# Altium PCB PCB.PcbDoc (part 2 of 2)
Units mm, origin at the board's own origin, x right, y up, seen from the top; angles counter-clockwise.
Board outline 100 x 25 mm, 4 copper layers (Top Layer, Layer 2, Layer 3, Bottom Layer), stack 1.513 mm thick; 98 components, 75 nets, 360 pads, 1081 vias.
Unrouted connection lines stored in the file: 86.
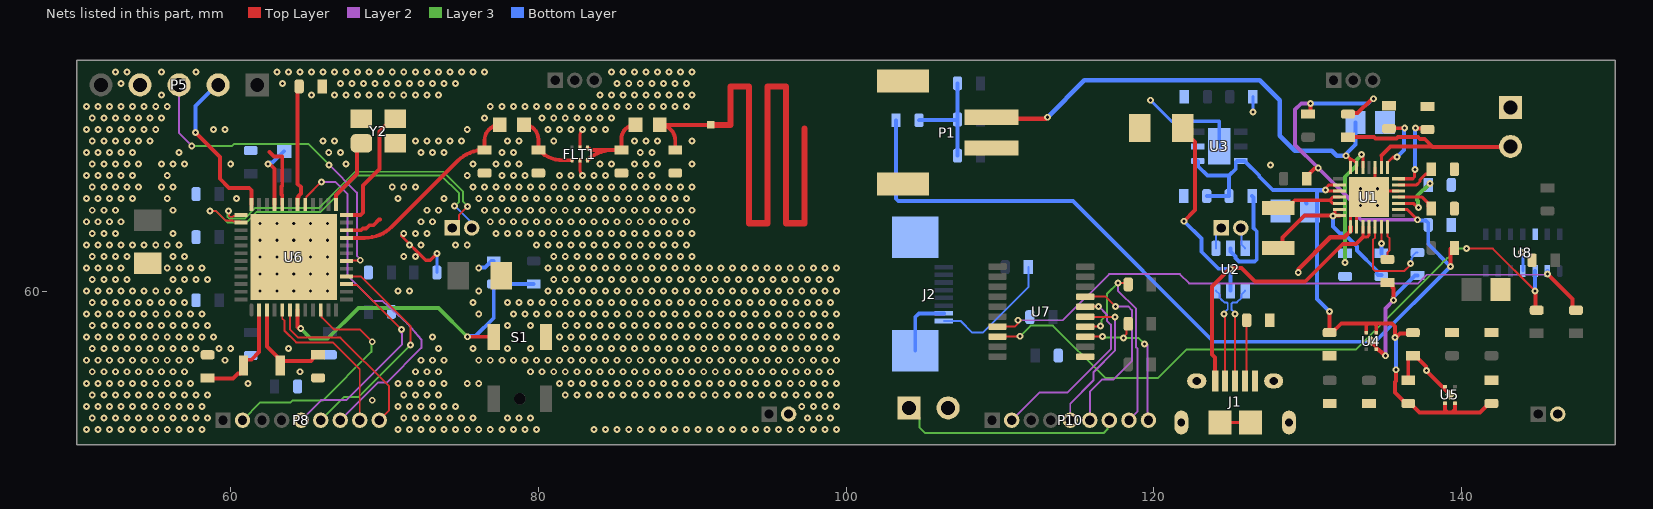
[diagram p4: the nets of this part, all layers, seen from the top]

## Via types
v1: diameter 0.45, hole 0.2, Top Layer to Bottom Layer, tented both sides, 1052 vias
v2: diameter 0.5, hole 0.2, Top Layer to Bottom Layer, 29 vias

## Nets (pads, with @x,y where several pads share a name; then routed paths per layer and width w, separated by ;. In a path a pad name is that pad's centre, name@x,y a point inside that pad or via, vN(x,y) a via of type N, cw(c..) or ccw(c..) an arc to the next point about the centre after c; other vN are vias at no path point) (continued)
GND: C1.1 C3.1 C4.1 C5.2 C6.2 C7.2 C8.2 C9.2 C10.1 C11.2 C12.2 C13.2 C14.2 C15.2 C16.2 C17.2 C18.2 C19.1 C20.1 C21.1 C22.1 C23.1 C24.1 C25.1 C26.1 C27.1 C28.1 C29.1 C30.1 C31.1 C32.1 C33.1 C34.2 C35.1 C36.1 C37.1 C38.1 C39.1 C40.1 D4.2 FLT1.2 FLT1.5 J1.5 J1.6 J1.7 J1.8 J1.9 J1.10 J1.11 J2.2 J2.MP1 J2.MP2 P1.2 P1.MP1 P1.MP2 P2.2 P5.4 P9.2 R5.1 R6.1 R7.1 R8.2 R9.2 R10.2 R12.2 R13.2 R15.1 RT1.1 S1.2 S3.2 U1.1 U1.2 U1.12 U1.17 U1.29 U2.2 U3.2 U3.7 U4.2 U4.5 U5.2 U5.5 U6.22 U6.32 U6.49 U7.11 U8.4 U8.12 Y2.2 Y2.4 | length 61.5
  Top Layer w0.2: v1@71.1,63.6 71.1,63.576 72.676,62 72.978,62 v1(73.404,62.426) ; FLT1.2@82.7,68.5 82.7,67.923 ccw(c83.298,67.923) v1(82.875,67.5) ; FLT1.5@82.7,69.3 82.7,70.077 cw(c83.298,70.077) v1(82.875,70.5) ; J1.10@124.3,51.45 J1.11@126.3,51.45 ; U1.1@132.8,64.175 U1.29@132.8,64.9 ; U1.2@133.2,64.175 U1.29@133.2,65.3 ; U1.29@134.4,66.8 U1.17@134.4,68.025 ; U1.29@134.7,66.5 U1.12@135.925,66.5
  Top Layer w0.254: 62.53,69.028 62.809,68.75 63.35,68.75 63.35,66.84 63.298,66.788 63.298,66.286 63.35,66.234 U6.32@63.35,65.625 ; U6.22@67.525,63.95 68.479,63.95 68.598,64.069 68.808,64.069 69.015,64.277 69.281,64.277 69.64,64.636 69.693,64.636 ; U1.29@132.827,64.927 133.2,65.3 v2(133.45,65.55) U1.29@134,66.1 ; U4.5@134.146,56.746 134.146,56.696 134.471,56.371 ; U1.29@134.4,66.8 v2(134.55,66.65) U1.29@134.7,66.5 ; U4.2@134.5,56.3 134.62,56.18 135.069,55.79 v1(135.07,55.791) ; R12.2@135.2,60.55 135.35,60.55 135.523,60.377 135.523,60.227 135.6,60.15 v1(135.6,59.4) ; C16.2@136.554,54.191 136.554,55.623 136.727,55.796 C11.2@136.85,55.796 137,55.796 137.708,55.088 137.708,54.88 v1(137.745,54.842) ; v1@137.745,54.83 137.745,54.792 139.259,53.279 U5.5@139.259,53.241
  Top Layer w0.3: v1(129.4,61.215) 129.429,61.244 129.429,61.429 131.488,63.488 132.388,63.488 132.8,63.9 U1.1@132.8,64.175
  Layer 2 w0.254: v1(135.07,55.791) 135.07,58.87 v1(135.6,59.4)
  Bottom Layer w0.2: C31.1@73.404,61.2 v1(73.404,62.426) ; v1(119.8,72.4) 121.165,71.035 124.265,71.035 U3.7@124.265,69.4 ; v1(126.45,71.65) C8.2@126.45,72.629 ; v1(143.9,62.5) 143.9,62.432 144,62.332 U8.4@144,61.3
  Bottom Layer w0.254: v1(76.125,61.5) 76.163,61.538 76.538,61.538 76.95,61.95 C34.2@77.1,61.95 ; J2.MP1@104.5,56.12 104.5,58.3 104.75,58.55 J2.2@106.36,58.55 ; U2.2@125,62.775 125,62.575 125.323,62.252 125.323,62.14 125.557,61.905 126.556,61.905 126.705,62.054 126.705,63.887 126.497,64.095 126.497,66.078 C5.2@126.404,66.171 ; v1(135.6,59.4) 135.6,59.6 137,61 R9.2@137.15,61
  other v1: 50.625,51 51.375,51 52.125,51 52.875,51 53.625,51 54.375,51 55.125,51 55.875,51 56.625,51 57.375,51 58.125,51 70.875,51 71.625,51 72.375,51 73.125,51 73.875,51 74.625,51 75.375,51 76.125,51 76.875,51 77.625,51 78.375,51 79.125,51 79.875,51 83.625,51 84.375,51 85.125,51 85.875,51 86.625,51 87.375,51 88.125,51 88.875,51 89.625,51 90.375,51 91.125,51 91.875,51 92.625,51 93.375,51 94.125,51 94.875,51 95.625,51 96.375,51 97.125,51 97.875,51 98.625,51 99.375,51 51,51.75 51.75,51.75 52.5,51.75 53.25,51.75 54,51.75 54.75,51.75 55.5,51.75 56.25,51.75 57,51.75 57.75,51.75 58.5,51.75 71.25,51.75 72,51.75 72.75,51.75 73.5,51.75 74.25,51.75 75,51.75 75.75,51.75 78,51.75 78.75,51.75 79.5,51.75 97.5,51.75 98.25,51.75 99,51.75 50.625,52.5 51.375,52.5 52.125,52.5 52.875,52.5 53.625,52.5 54.375,52.5 55.125,52.5 55.875,52.5 56.625,52.5 57.375,52.5 58.125,52.5 70.875,52.5 71.625,52.5 72.375,52.5 73.125,52.5 73.875,52.5 74.625,52.5 97.125,52.5 97.875,52.5 98.625,52.5 99.375,52.5 69.2,52.9 51,53.25 51.75,53.25 52.5,53.25 53.25,53.25 54,53.25 54.75,53.25 55.5,53.25 56.25,53.25 57,53.25 57.75,53.25 58.5,53.25 71.25,53.25 72,53.25 72.75,53.25 73.5,53.25 81.75,53.25 82.5,53.25 83.25,53.25 84,53.25 84.75,53.25 85.5,53.25 86.25,53.25 87,53.25 87.75,53.25 88.5,53.25 89.25,53.25 90,53.25 90.75,53.25 91.5,53.25 92.25,53.25 93,53.25 93.75,53.25 94.5,53.25 95.25,53.25 96,53.25 96.75,53.25 97.5,53.25 98.25,53.25 99,53.25 50.625,54 51.375,54 52.125,54 52.875,54 53.625,54 54.375,54 55.125,54 55.875,54 56.625,54 57.375,54 61.125,54 70.875,54 71.625,54 72.375,54 73.125,54 73.875,54 75.375,54 76.125,54 81.375,54 82.125,54 82.875,54 83.625,54 84.375,54 85.125,54 85.875,54 86.625,54 87.375,54 88.125,54 88.875,54 89.625,54 90.375,54 91.125,54 91.875,54 92.625,54 93.375,54 94.125,54 94.875,54 95.625,54 96.375,54 97.125,54 97.875,54 98.625,54 99.375,54 51,54.75 51.75,54.75 52.5,54.75 53.25,54.75 54,54.75 54.75,54.75 55.5,54.75 56.25,54.75 57,54.75 64.5,54.75 72,54.75 72.75,54.75 73.5,54.75 79.5,54.75 80.25,54.75 81,54.75 81.75,54.75 82.5,54.75 83.25,54.75 84,54.75 84.75,54.75 85.5,54.75 86.25,54.75 87,54.75 87.75,54.75 88.5,54.75 89.25,54.75 90,54.75 90.75,54.75 91.5,54.75 92.25,54.75 93,54.75 93.75,54.75 94.5,54.75 95.25,54.75 96,54.75 96.75,54.75 97.5,54.75 98.25,54.75 99,54.75 50.625,55.5 51.375,55.5 52.125,55.5 52.875,55.5 53.625,55.5 54.375,55.5 55.125,55.5 55.875,55.5 56.625,55.5 57.375,55.5 59.625,55.5 72.375,55.5 73.125,55.5 73.875,55.5 76.125,55.5 76.875,55.5 77.625,55.5 78.375,55.5 79.125,55.5 79.875,55.5 80.625,55.5 81.375,55.5 82.125,55.5 82.875,55.5 83.625,55.5 84.375,55.5 85.125,55.5 85.875,55.5 86.625,55.5 87.375,55.5 88.125,55.5 88.875,55.5 89.625,55.5 90.375,55.5 91.125,55.5 91.875,55.5 92.625,55.5 93.375,55.5 94.125,55.5 94.875,55.5 95.625,55.5 96.375,55.5 97.125,55.5 97.875,55.5 98.625,55.5 99.375,55.5 51,56.25 51.75,56.25 52.5,56.25 53.25,56.25 54,56.25 54.75,56.25 55.5,56.25 56.25,56.25 57,56.25 57.75,56.25 59.25,56.25 60,56.25 63.75,56.25 73.5,56.25 75.75,56.25 78,56.25 79.5,56.25 81.75,56.25 82.5,56.25 83.25,56.25 84,56.25 84.75,56.25 85.5,56.25 86.25,56.25 87,56.25 87.75,56.25 88.5,56.25 89.25,56.25 90,56.25 90.75,56.25 91.5,56.25 92.25,56.25 93,56.25 93.75,56.25 94.5,56.25 95.25,56.25 96,56.25 96.75,56.25 97.5,56.25 98.25,56.25 99,56.25 50.625,57 51.375,57 52.125,57 52.875,57 53.625,57 54.375,57 55.125,57 55.875,57 56.625,57 57.375,57 58.125,57 58.875,57 73.125,57 81.375,57 82.125,57 82.875,57 83.625,57 84.375,57 85.125,57 85.875,57 86.625,57 87.375,57 88.125,57 88.875,57 89.625,57 90.375,57 91.125,57 91.875,57 92.625,57 93.375,57 94.125,57 94.875,57 95.625,57 96.375,57 97.125,57 97.875,57 98.625,57 99.375,57 51,57.75 51.75,57.75 52.5,57.75 53.25,57.75 54,57.75 54.75,57.75 55.5,57.75 56.25,57.75 57,57.75 57.75,57.75 58.5,57.75 78,57.75 79.5,57.75 81.75,57.75 82.5,57.75 83.25,57.75 84,57.75 84.75,57.75 85.5,57.75 86.25,57.75 87,57.75 87.75,57.75 88.5,57.75 89.25,57.75 90,57.75 90.75,57.75 91.5,57.75 92.25,57.75 93,57.75 93.75,57.75 94.5,57.75 95.25,57.75 96,57.75 96.75,57.75 97.5,57.75 98.25,57.75 99,57.75 50.625,58.5 51.375,58.5 52.125,58.5 52.875,58.5 53.625,58.5 54.375,58.5 55.125,58.5 55.875,58.5 56.625,58.5 57.375,58.5 58.125,58.5 76.125,58.5 78.375,58.5 79.125,58.5 79.875,58.5 80.625,58.5 81.375,58.5 82.125,58.5 82.875,58.5 83.625,58.5 84.375,58.5 85.125,58.5 85.875,58.5 86.625,58.5 87.375,58.5 88.125,58.5 88.875,58.5 89.625,58.5 90.375,58.5 91.125,58.5 91.875,58.5 92.625,58.5 93.375,58.5 94.125,58.5 94.875,58.5 95.625,58.5 96.375,58.5 97.125,58.5 97.875,58.5 98.625,58.5 99.375,58.5 51,59.25 51.75,59.25 52.5,59.25 53.25,59.25 54,59.25 54.75,59.25 55.5,59.25 56.25,59.25 57,59.25 75.75,59.25 78,59.25 78.75,59.25 79.5,59.25 80.25,59.25 81,59.25 81.75,59.25 82.5,59.25 83.25,59.25 84,59.25 84.75,59.25 85.5,59.25 86.25,59.25 87,59.25 87.75,59.25 88.5,59.25 89.25,59.25 90,59.25 90.75,59.25 91.5,59.25 92.25,59.25 93,59.25 93.75,59.25 94.5,59.25 95.25,59.25 96,59.25 96.75,59.25 97.5,59.25 98.25,59.25 99,59.25 50.625,60 51.375,60 52.125,60 52.875,60 53.625,60 54.375,60 55.125,60 55.875,60 56.625,60 70.875,60 71.625,60 76.125,60 80.625,60 81.375,60 82.125,60 82.875,60 83.625,60 84.375,60 85.125,60 85.875,60 86.625,60 87.375,60 88.125,60 88.875,60 89.625,60 90.375,60 91.125,60 91.875,60 92.625,60 93.375,60 94.125,60 94.875,60 95.625,60 96.375,60 97.125,60 97.875,60 98.625,60 99.375,60 51,60.75 51.75,60.75 52.5,60.75 53.25,60.75 56.25,60.75 57,60.75 57.75,60.75 58.5,60.75 81,60.75 81.75,60.75 82.5,60.75 83.25,60.75 84,60.75 84.75,60.75 85.5,60.75 86.25,60.75 87,60.75 87.75,60.75 88.5,60.75 89.25,60.75 90,60.75 90.75,60.75 91.5,60.75 92.25,60.75 93,60.75 93.75,60.75 94.5,60.75 95.25,60.75 96,60.75 96.75,60.75 97.5,60.75 98.25,60.75 99,60.75 50.625,61.5 51.375,61.5 52.125,61.5 52.875,61.5 55.875,61.5 56.625,61.5 57.375,61.5 58.125,61.5 80.625,61.5 81.375,61.5 82.125,61.5 82.875,61.5 83.625,61.5 84.375,61.5 85.125,61.5 85.875,61.5 86.625,61.5 87.375,61.5 88.125,61.5 88.875,61.5 89.625,61.5 90.375,61.5 91.125,61.5 91.875,61.5 92.625,61.5 93.375,61.5 94.125,61.5 94.875,61.5 95.625,61.5 96.375,61.5 97.125,61.5 97.875,61.5 98.625,61.5 99.375,61.5 51,62.25 51.75,62.25 52.5,62.25 53.25,62.25 56.25,62.25 57,62.25 71.25,62.25 72,62.25 81,62.25 81.75,62.25 82.5,62.25 83.25,62.25 84,62.25 84.75,62.25 85.5,62.25 86.25,62.25 87,62.25 87.75,62.25 88.5,62.25 89.25,62.25 90,62.25 50.625,63 51.375,63 52.125,63 52.875,63 53.625,63 54.375,63 55.125,63 55.875,63 56.625,63 71.625,63 72.375,63 74.625,63 75.375,63 79.875,63 80.625,63 81.375,63 82.125,63 82.875,63 83.625,63 84.375,63 85.125,63 85.875,63 86.625,63 87.375,63 88.125,63 88.875,63 89.625,63 51,63.75 51.75,63.75 52.5,63.75 56.25,63.75 71.25,63.75 72,63.75 72.75,63.75 77.25,63.75 78,63.75 78.75,63.75 79.5,63.75 80.25,63.75 81,63.75 81.75,63.75 82.5,63.75 83.25,63.75 84,63.75 84.75,63.75 85.5,63.75 86.25,63.75 87,63.75 87.75,63.75 88.5,63.75 89.25,63.75 90,63.75 50.625,64.5 51.375,64.5 52.125,64.5 52.875,64.5 72.375,64.5 73.125,64.5 76.875,64.5 77.625,64.5 78.375,64.5 79.125,64.5 79.875,64.5 80.625,64.5 81.375,64.5 82.125,64.5 82.875,64.5 83.625,64.5 84.375,64.5 85.125,64.5 85.875,64.5 86.625,64.5 87.375,64.5 88.125,64.5 88.875,64.5 89.625,64.5 51,65.25 51.75,65.25 52.5,65.25 56.25,65.25 72.75,65.25 73.5,65.25 76.5,65.25 77.25,65.25 78,65.25 78.75,65.25 79.5,65.25 80.25,65.25 81,65.25 81.75,65.25 82.5,65.25 83.25,65.25 84,65.25 84.75,65.25 85.5,65.25 86.25,65.25 87,65.25 87.75,65.25 88.5,65.25 89.25,65.25 90,65.25 50.625,66 51.375,66 52.125,66 52.875,66 53.625,66 55.875,66 60.375,66 70.875,66 73.875,66 76.125,66 76.875,66 77.625,66 78.375,66 79.125,66 79.875,66 80.625,66 81.375,66 82.125,66 82.875,66 83.625,66 84.375,66 85.125,66 85.875,66 86.625,66 87.375,66 88.125,66 88.875,66 89.625,66 51,66.75 51.75,66.75 52.5,66.75 53.25,66.75 54,66.75 55.5,66.75 56.25,66.75 70.5,66.75 71.25,66.75 72,66.75 75.75,66.75 76.5,66.75 77.25,66.75 78,66.75 78.75,66.75 79.5,66.75 80.25,66.75 81,66.75 81.75,66.75 82.5,66.75 83.25,66.75 84,66.75 84.75,66.75 85.5,66.75 86.25,66.75 87,66.75 87.75,66.75 88.5,66.75 89.25,66.75 90,66.75 50.625,67.5 51.375,67.5 52.125,67.5 52.875,67.5 53.625,67.5 55.875,67.5 75.375,67.5 77.625,67.5 78.375,67.5 79.125,67.5 81.375,67.5 82.125,67.5 83.625,67.5 84.375,67.5 86.625,67.5 87.375,67.5 127.6,68.193 51,68.25 51.75,68.25 52.5,68.25 53.25,68.25 54,68.25 55.5,68.25 56.25,68.25 57,68.25 60,68.25 67.5,68.25 75.75,68.25 77.25,68.25 78,68.25 78.75,68.25 84,68.25 84.75,68.25 86.25,68.25 87,68.25 87.75,68.25 90,68.25 50.625,69 51.375,69 52.125,69 52.875,69 53.625,69 56.625,69 66.375,69 67.125,69 72.375,69 73.125,69 73.875,69 77.625,69 78.375,69 86.625,69 87.375,69 51,69.75 51.75,69.75 52.5,69.75 53.25,69.75 54,69.75 54.75,69.75 66,69.75 66.75,69.75 72,69.75 72.75,69.75 73.5,69.75 74.25,69.75 75,69.75 78,69.75 78.75,69.75 81,69.75 86.25,69.75 87,69.75 87.75,69.75 90,69.75 50.625,70.5 51.375,70.5 52.125,70.5 52.875,70.5 53.625,70.5 54.375,70.5 55.125,70.5 58.875,70.5 59.625,70.5 75.375,70.5 80.625,70.5 81.375,70.5 82.125,70.5 83.625,70.5 84.375,70.5 51,71.25 51.75,71.25 52.5,71.25 53.25,71.25 54,71.25 54.75,71.25 55.5,71.25 76.5,71.25 80.25,71.25 81,71.25 81.75,71.25 82.5,71.25 83.25,71.25 84,71.25 84.75,71.25 50.625,72 51.375,72 52.125,72 52.875,72 53.625,72 54.375,72 55.125,72 55.875,72 76.875,72 77.625,72 78.375,72 79.125,72 79.875,72 80.625,72 81.375,72 82.125,72 82.875,72 83.625,72 84.375,72 85.125,72 85.875,72 86.625,72 87.375,72 88.125,72 88.875,72 89.625,72 55.5,72.75 65.25,72.75 66.75,72.75 67.5,72.75 68.25,72.75 69,72.75 69.75,72.75 70.5,72.75 71.25,72.75 72,72.75 72.75,72.75 73.5,72.75 84,72.75 84.75,72.75 85.5,72.75 86.25,72.75 87,72.75 87.75,72.75 88.5,72.75 89.25,72.75 90,72.75 52.875,73.5 63.375,73.5 67.125,73.5 67.875,73.5 68.625,73.5 69.375,73.5 70.125,73.5 70.875,73.5 71.625,73.5 72.375,73.5 73.125,73.5 73.875,73.5 74.625,73.5 85.125,73.5 85.875,73.5 86.625,73.5 87.375,73.5 88.125,73.5 88.875,73.5 89.625,73.5 52.5,74.25 53.25,74.25 55.5,74.25 57.75,74.25 63,74.25 63.75,74.25 64.5,74.25 65.25,74.25 66,74.25 66.75,74.25 67.5,74.25 68.25,74.25 69,74.25 69.75,74.25 70.5,74.25 71.25,74.25 72,74.25 72.75,74.25 73.5,74.25 74.25,74.25 75,74.25 75.75,74.25 76.5,74.25 84.75,74.25 85.5,74.25 86.25,74.25 87,74.25 87.75,74.25 88.5,74.25 89.25,74.25 90,74.25
  other v2: 61.9,60 63,60 64.1,60 65.2,60 66.3,60 61.9,61.1 63,61.1 64.1,61.1 65.2,61.1 66.3,61.1 61.9,62.2 63,62.2 64.1,62.2 65.2,62.2 66.3,62.2 61.9,63.3 63,63.3 64.1,63.3 65.2,63.3 66.3,63.3 61.9,64.4 63,64.4 64.1,64.4 65.2,64.4 66.3,64.4 134.55,65.55 133.45,66.65
I2C1_SCL: P10.8 R16.1 U7.14 | length 14.7
  Top Layer w0.127: U7.14@115.55,57.679 115.571,57.701 116.524,57.701 v1(116.546,57.722) ; v1(117.673,60.517) 118.262,60.517 R16.1@118.35,60.429
  Layer 2 w0.127: v1(117.673,60.517) 117.673,60.027 118.863,58.837 118.863,56.333 118.963,56.233 118.963,52.173 P10.8@118.39,51.6
  Layer 3 w0.127: v1(116.546,57.722) 116.608,57.784 116.608,58.109 116.968,58.469 116.968,59.812 v1(117.673,60.517)
  Bottom Layer w0.127: v1@116.524,57.701 v1(116.546,57.722)
I2C1_SCL_1V8: R20.1 U7.7 U8.2 | length 41.5
  Top Layer w0.127: U7.7@109.85,57.679 110.979,57.679 111.4,58.1 v1(111.171,58.1)
  Top Layer w0.254: v1(145.6,61.102) 147.218,59.484 147.218,58.921 147.389,58.75 R20.1@147.454,58.75
  Layer 2 w0.127: v1(111.171,58.1) 114.1,58.1 117.1,61.1 121.7,61.1 122.3,60.5 137.2,60.5 137.757,61.058 145.556,61.058 v1(145.6,61.102)
  Bottom Layer w0.254: v1(145.6,61.102) U8.2@145.6,61.3
I2C1_SCL_STM: P8.8 U6.5 | length 10.7
  Top Layer w0.127: U6.5@63.35,58.775 63.35,58.207 63.5,58.057 63.5,57.4 64.247,56.653 66.647,56.653 68.39,54.91 P8.8@68.39,51.6
I2C1_SDA: P10.9 R17.1 U7.13 | length 10.4
  Top Layer w0.127: U7.13@115.55,57.029 v1(116.671,57.029) ; v1(118.043,56.941) 118.043,57.028 118.249,57.235 118.249,57.774 R17.1@118.35,57.875
  Layer 2 w0.127: v1(119.406,56.557) 119.543,56.557 119.601,56.499 119.601,51.659 P10.9@119.66,51.6
  Layer 3 w0.127: v1(116.671,57.029) 116.715,56.985 117.901,56.985 v1@117.994,56.892 ; v1(118.043,56.941) v1@117.994,56.892 ; v1(119.406,56.557) 119.023,56.941 118.091,56.941 118.043,56.892 v1@117.994,56.892
I2C1_SDA_1V8: R21.1 U7.8 U8.3 | length 43.9
  Top Layer w0.127: U7.8@109.85,57.029 109.865,57.044 111.305,57.044 v1(111.319,57.059) ; v1(140.329,62.751) 142.049,62.751 v1(144.8,60)
  Top Layer w0.254: v1(144.8,60) 144.838,59.962 144.838,58.812 R21.1@144.9,58.75
  Layer 3 w0.127: v1(111.319,57.059) 111.359,57.059 111.359,57.098 112.008,57.747 113.453,57.747 116.846,54.354 120.295,54.354 122.141,56.2 133.167,56.2 138.757,61.79 138.757,61.825 139.075,62.143 139.11,62.143 139.718,62.751 v1(140.329,62.751)
  Bottom Layer w0.254: v1(144.8,60) U8.3@144.8,61.3
I2C1_SDA_STM: P8.9 U6.6 | length 11.7
  Top Layer w0.127: U6.6@63.85,58.775 63.85,57.499 63.925,57.424 64.378,56.971 67.129,56.971 70.3,53.8 70.3,52.24 P8.9@69.66,51.6
NetANT1_1: ANT1.1 C22.2 L3.2 | length 5.5
  Top Layer w0.254: C22.2@88.9,69.171 88.9,69.785 ccw(c87.885,69.785) L3.2@87.885,70.8 ANT1.1@91.2,70.8
NetC2_1: C2.1 L1.2 U1.27 U1.28 | length 11.1
  Top Layer w0.2: v1(131.655,64.867) 131.687,64.9 U1.28@131.777,64.9 ; U1.27@131.777,65.3 131.777,65 U1.28@131.877,64.9
  Top Layer w0.254: L1.2@128.1,62.8 128.382,63.082 128.382,63.482 129.8,64.9 131.622,64.9 131.65,64.872 131.776,64.872 U1.28@131.777,64.873 ; U1.28@131.777,64.9 U1.28@132.075,64.9
  Bottom Layer w0.254: v1(131.655,64.867) 131.655,64.195 132.115,63.735 132.378,63.735 133.227,62.885 133.227,62.623 134.504,61.346 134.504,61.121 134.575,61.05 C2.1@134.8,61.05
NetC2_2: C2.2 U1.6 | length 1.6
  Top Layer w0.127: v1@134.8,63.2 U1.6@134.8,64.175
  Bottom Layer w0.254: C2.2@134.8,62.45 v1(134.8,63.1)
NetC4_2: C4.2 P1.1 U1.20 U1.21 | length 31.4
  Top Layer w0.2: v1(132.5,68.794) 132.781,68.616 ; U1.21@132.8,68.025 132.8,68.35 132.781,68.616 ; U1.20@133.2,68.025 133.2,68.35 133.062,68.438 132.781,68.616
  Top Layer w0.3: P1.1@109.45,71.3 109.55,71.2 112.967,71.2 113.063,71.296 v1(113.104,71.296)
  Bottom Layer w0.254: 132.598,68.998 133.127,69.527 C4.2@133.127,70.953
  Bottom Layer w0.3: v1(113.104,71.296) 113.104,71.304 115.5,73.7 126.9,73.7 128.2,72.4 128.2,70.1 129.178,69.122 131.578,69.122 131.906,68.794 v1(132.5,68.794)
NetC10_2: C10.2 U1.10 | length 3.3
  Top Layer w0.2: U1.10@136.223,65.7 136.878,65.7 v1@137.181,65.397
  Top Layer w0.254: v1@137.181,65.397 v1(137.214,65.43)
  Layer 3 w0.254: v1(137.214,65.43) 137.177,65.467 137.177,65.863 137.131,65.909 137.131,66.163 v1(137.957,66.99)
  Bottom Layer w0.254: C10.2@137.85,66.9 137.85,66.985 137.855,66.99 v1(137.957,66.99)
NetC19_2: C19.2 L2.1 U6.21 | length 13.3
  Top Layer w0.254: U6.21@67.525,63.45 68.698,63.45 ccw(c68.698,65.99) 70.494,64.194 74.743,68.443 cw(c76.5,66.686) C19.2@76.5,69.171 76.5,69.8 cw(c77.5,69.8) L2.1@77.5,70.8
NetC20_2: C20.2 FLT1.1 L2.2 | length 4.5
  Top Layer w0.254: L2.2@79.07,70.8 cw(c79.07,69.87) 80,69.87 C20.2@80,69.171 ccw(c81.619,70.79) 81.619,68.5 FLT1.1@82.2,68.5
NetC21_2: C21.2 FLT1.3 FLT1.4 L3.1 | length 6.2
  Top Layer w0.254: FLT1.3@83.2,68.5 cw(c84.819,66.881) 84.819,69.171 ; FLT1.4@83.2,69.3 ccw(c83.512,69.612) 83.512,69.171 84.819,69.171 ; L3.1@86.315,70.8 ccw(c86.315,69.885) 85.4,69.885 C21.2@85.4,69.171 84.819,69.171
NetD1_1: D1.1 D2.1 D3.1 R1.1 | length 7.2
  Bottom Layer w0.254: R1.1@104.75,71.1 104.775,71.125 107.225,71.125 D2.1@107.25,71.15 ; D3.1@107.25,68.799 D2.1@107.25,71.15 ; D1.1@107.25,73.5 D2.1@107.25,71.15
NetD4_1: D4.1 U6.30 | length 7.9
  Top Layer w0.254: U6.30@64.35,65.625 U6.30@64.35,65.625 64.352,66.039 64.398,66.085 64.398,66.185 64.562,66.349 64.562,66.751 64.352,66.961 64.352,73.202 D4.1@64.45,73.3
NetJ1_4: J1.4 R8.1 | length 4
  Top Layer w0.127: J1.4@125.95,54.15 126.05,54.25 R8.1@126.05,58.1
NetJ2_1: J2.1 R19.2 | length 8.3
  Bottom Layer w0.127: J2.1@106.36,58.05 107.45,58.05 108.2,57.3 108.9,57.3 111.85,60.25 R19.2@111.85,61.554
NetL1_1: L1.1 U1.25 U1.26 | length 5
  Top Layer w0.2: U1.26@132.075,65.7 131.649,65.7 131.449,65.9 131.451,65.902 131.649,66.1 U1.25@132.075,66.1
  Top Layer w0.254: L1.1@128.1,65.4 128.7,65.4 129.023,65.723 129.023,65.754 129.172,65.902 131.102,65.902 131.451,65.902
NetL4_1: L4.1 U6.33 | length 4.3
  Top Layer w0.254: v1(62.411,68.26) 62.46,68.26 62.5,68.3 62.85,67.95 U6.33@62.85,65.625
  Bottom Layer w0.254: v1(62.411,68.26) 62.46,68.26 62.5,68.3 62.547,68.347 62.716,68.347 63.454,69.085 L4.1@63.479,69.085
NetR5_2: R5.2 U1.19 | length 9
  Top Layer w0.2: v1(133.506,68.882) 133.506,68.815 133.6,68.721 U1.19@133.6,68.025
  Layer 3 w0.254: v1(132.45,61.85) 132.45,67.43 133.186,68.166 133.186,68.509 133.506,68.829 v1(133.506,68.882)
  Bottom Layer w0.254: v1(132.45,61.85) R5.2@132.45,62.45
NetR6_2: R6.2 U1.13 | length 2.7
  Top Layer w0.2: U1.13@135.925,66.9 137.1,66.9 137.318,67.118 137.318,67.237 137.677,67.596 R6.2@137.877,67.596
  Top Layer w0.254: R6.2@137.877,67.596 138.05,67.769 R6.2@138.05,67.919
NetR7_2: R7.2 U1.11 | length 2.6
  Top Layer w0.2: U1.11@135.925,66.1 137.454,66.1 137.85,65.704 R7.2@137.85,65.504
  Top Layer w0.254: R7.2@137.85,65.504 137.85,65.554 R7.2@138.05,65.354
NetR9_1: R9.1 U1.5 | length 6.5
  Top Layer w0.127: U1.5@134.4,64.175 134.364,64.139 134.4,64.102 134.4,63.467 134.257,63.325 134.257,61.457 134.415,61.3 136.3,61.3 136.7,61.7 v1(136.7,61.779)
  Bottom Layer w0.127: v1(136.7,61.779) 136.762,61.841 136.762,62.111 136.817,62.167 136.817,62.27 137.047,62.5 R9.1@137.15,62.5
NetR10_1: R10.1 U1.14 | length 5.1
  Top Layer w0.2: U1.14@135.925,67.3 136.845,67.3 136.962,67.417 v1@136.962,67.888
  Top Layer w0.254: v1@136.962,67.889 v1(137,67.889) ; v1(137.026,70.606) 137.063,70.568 137.732,70.568 R10.1@137.8,70.5
  Bottom Layer w0.254: v1(137,67.889) 137,70.58 v1(137.026,70.606)
NetR11_2: R11.2 RT1.2 U1.16 | length 15.2
  Top Layer w0.2: U1.16@134.8,68.025 134.8,68.8 ; 135.4,69.376 135.4,69.4
  Top Layer w0.254: R11.2@132.633,70 134.338,70 134.416,69.923 135.798,69.923 135.875,70 137.175,70 137.302,69.873 137.627,69.873 138.127,69.373 143.173,69.373 RT1.2@143.2,69.4 ; 134.8,68.8 135.4,69.4 138.1,69.4
NetR12_1: R12.1 U1.7 | length 2.2
  Top Layer w0.127: R12.1@135.2,62.05 135.2,62.5 135.343,62.642 135.343,63.425 135.2,63.567 U1.7@135.2,64.175
NetR13_1: R13.1 U1.15 | length 4.5
  Top Layer w0.2: U1.15@135.2,68.025 135.2,68.35 135.528,68.678 135.6,68.678 135.804,68.678 v1(135.825,68.699)
  Top Layer w0.254: R13.1@135.3,70.55 135.328,70.578 136.294,70.578 v1(136.322,70.606) ; 135.6,68.678 135.804,68.678 v1(135.825,68.699)
  Bottom Layer w0.254: v1(135.825,68.699) 136.288,69.161 136.288,70.572 v1(136.322,70.606)
NRESET: C34.1 R14.2 S1.1 U6.7 | length 22.9
  Top Layer w0.254: U6.7@64.35,58.775 64.35,57.646 64.396,57.6 64.516,57.6 v1(64.554,57.562) ; v1(75.406,57.025) 77.075,57.025 S1.1@77.1,57
  Layer 3 w0.254: v1(64.554,57.562) 64.554,57.546 64.56,57.546 65.199,56.907 66.307,56.907 68.3,58.9 73.5,58.9 75.375,57.025 v1(75.406,57.025)
  Bottom Layer w0.254: v1@64.501,57.562 v1(64.554,57.562) ; v1(75.406,57.025) 75.444,57.063 75.92,57.063 77.1,58.243 C34.1@77.1,60.45 R14.2@79.7,60.45
OSC32_IN: C23.2 U6.2 Y1.1 | length 7.1
  Top Layer w0.254: C23.2@58.5,54.35 58.525,54.325 60.151,54.325 60.468,54.642 60.654,54.642 60.827,54.815 60.827,55.36 61,55.533 61.359,55.533 61.85,56.024 U6.2@61.85,58.775
OSC32_OUT: C24.2 U6.3 Y1.2 | length 6.3
  Top Layer w0.254: U6.3@62.35,58.775 62.35,56.392 63.227,55.515 63.227,55.462 65.207,55.462 65.356,55.61 65.356,55.677 65.529,55.85 C24.2@65.679,55.85
OSC_IN: U6.25 Y2.1 | length 4.7
  Top Layer w0.254: U6.25@66.85,65.625 66.85,66.25 68.2,67.6 68.2,69.3 Y2.1@68.5,69.6
OSC_OUT: U6.24 Y2.3 | length 8.2
  Top Layer w0.254: U6.24@67.525,64.95 68.451,64.95 68.6,65.099 68.6,66.854 69.673,67.927 69.673,70.386 70.014,70.727 70.227,70.727 Y2.3@70.7,71.2
SPI1_MOSI: P10.6 U7.17 | length 12.2
  Top Layer w0.127: U7.17@115.55,59.629 116.885,59.629 v1(117.51,59.004)
  Layer 2 w0.127: P10.6@115.85,51.6 115.85,53.45 116.638,54.238 117.384,54.238 118.585,55.439 118.585,58.756 118.337,59.004 v1(117.51,59.004)
  Bottom Layer w0.127: v1@117.423,59.004 v1(117.51,59.004)
SPI1_MOSI_STM: P8.6 U6.16 | length 14.6
  Top Layer w0.127: U6.16@67.525,60.95 68.45,60.95 71.7,57.7 v1(71.7,56.5)
  Layer 3 w0.127: P8.6@65.85,51.6 67.35,53.1 68.3,53.1 v1(71.7,56.5)
SPI1_NSS: P10.5 U7.15 | length 9.9
  Top Layer w0.127: U7.15@115.55,58.329 115.565,58.315 117.485,58.315 v1(117.5,58.3)
  Layer 2 w0.127: P10.5@114.58,51.6 114.58,52.68 116.09,54.19 116.09,54.731 117.5,56.141 v1(117.5,58.3)
  Bottom Layer w0.127: v1@117.485,58.315 v1(117.5,58.3)
SPI1_NSS_STM: P8.5 U6.15 | length 14.4
  Top Layer w0.127: U6.15@67.525,60.45 67.587,60.389 68.219,60.389 v1(71.101,57.507)
  Layer 2 w0.127: P8.5@64.58,51.6 65.88,52.9 67.5,52.9 71.143,56.543 71.143,57.221 71.063,57.301 71.031,57.332 71.031,57.438 v1(71.101,57.507)
SPI1_SCK: P10.2 U7.16 | length 12.4
  Top Layer w0.127: U7.16@115.55,58.979 115.563,58.992 116.412,58.992 v1(116.425,59.005)
  Layer 2 w0.127: P10.2@110.77,51.6 112.565,53.395 114.395,53.395 117.213,56.213 117.213,57.82 116.958,58.075 116.958,58.472 v1(116.425,59.005)
  Bottom Layer w0.127: v1@116.412,58.992 v1(116.425,59.005)
SPI1_SCK_STM: P8.2 U6.10 | length 15.4
  Top Layer w0.127: U6.10@65.85,58.775 65.912,58.713 65.912,58.291 66.702,57.5 68.4,57.5 v1(69.2,56.7)
  Layer 3 w0.127: P8.2@60.77,51.6 61.933,52.763 63.898,52.763 64.007,52.872 65.972,52.872 69.146,56.046 69.146,56.646 v1(69.2,56.7)
USART1_RX_STM: P5.2 U6.36 | length 10.7
  Top Layer w0.254: v1(57.7,70.3) 59.3,68.7 59.3,67.3 59.9,66.7 61.201,66.7 61.35,66.551 U6.36@61.35,65.625
  Bottom Layer w0.254: v1(57.7,70.3) 57.7,72.022 59.078,73.4 P5.2@59.186,73.4
USART1_TX_STM: P5.3 U6.18 | length 21.8
  Top Layer w0.127: U6.18@67.525,61.95 67.55,61.975 68.394,61.975 v1(68.419,62.001)
  Layer 2 w0.127: P5.3@56.646,73.4 56.646,70.254 v1(57.467,69.433) ; v1(66.4,68.2) 68.2,66.4 68.2,62.307 68.419,62.088 v1(68.419,62.001)
  Layer 3 w0.127: v1(57.467,69.433) 60.086,69.433 60.223,69.571 65.029,69.571 v1(66.4,68.2)
USB_N: P3.1 U2.1 | length 1.5
  Bottom Layer w0.127: U2.1@124.05,62.775 124.05,63.75 P3.1@124.4,64.1
USB_P: P3.2 U2.3 | length 1.4
  Bottom Layer w0.127: P3.2@125.67,64.1 125.713,64.057 125.713,63.011 U2.3@125.95,62.775
USBIN_N: J1.2 U2.6 | length 6.4
  Top Layer w0.127: v1(124.576,58.499) 124.622,58.499 124.65,58.473 J1.2@124.65,54.15
  Bottom Layer w0.127: U2.6@124.05,60.025 124.286,59.789 124.286,59.566 124.436,59.416 124.591,59.261 124.743,59.261 124.818,59.187 124.818,58.813 124.576,58.571 v1(124.576,58.499)
USBIN_P: J1.3 U2.4 | length 6.5
  Top Layer w0.127: v1(125.28,58.508) 125.289,58.5 125.327,58.5 125.3,58.473 J1.3@125.3,54.15
  Bottom Layer w0.127: v1(125.28,58.508) 125.28,58.563 125.072,58.771 125.072,59.187 125.146,59.261 125.409,59.261 125.713,59.566 125.713,59.789 U2.4@125.95,60.025
USBSTM_N: P6.1 U6.37 | length 21.5
  Top Layer w0.127: v1(59.856,65.207) 59.884,65.179 59.884,64.901 59.958,64.827 60.129,64.827 60.191,64.888 60.614,64.888 U6.37@60.675,64.95 ; P6.1@74.4,64.1 74.837,64.537 74.837,64.937 v1@75.3,65.4
  Layer 3 w0.127: v1(59.856,65.207) 59.794,65.145 59.794,64.817 59.911,64.7 60.9,64.7 61.6,65.4 65.741,65.4 68.095,67.754 73.805,67.754 75.105,66.454 75.105,65.815 75.4,65.52 v1(75.4,65.5)
USBSTM_P: P6.2 U6.38 | length 23.5
  Top Layer w0.127: v1(58.644,65.213) 58.664,65.193 59.06,65.193 59.515,64.737 59.679,64.573 60.129,64.573 60.191,64.512 60.614,64.512 U6.38@60.675,64.45
  Layer 3 w0.127: v1(58.644,65.213) 58.664,65.193 59.06,65.193 59.515,64.737 59.806,64.446 61.005,64.446 61.705,65.146 65.846,65.146 68.2,67.5 73.7,67.5 74.851,66.349 74.851,65.815 74.576,65.54 v1(74.557,65.54)
  Bottom Layer w0.127: v1(74.557,65.54) 75.567,64.529 75.67,64.529 P6.2@75.67,64.1
USER_BTN: P10.7 S3.1 | length 14.7
  Layer 3 w0.127: S3.1@104.1,52.4 104.787,51.713 104.787,51.114 105.127,50.773 114.825,50.773 116.773,50.773 116.999,50.999 116.999,51.479 P10.7@117.12,51.6
USER_BTN_STM: P8.7 U6.29 | length 23.5
  Top Layer w0.127: U6.29@64.85,65.625 64.912,65.687 64.912,66.112 v1(65.9,67.1)
  Layer 2 w0.127: v1(65.9,67.1) 66.8,67.1 67.6,66.3 67.6,61 69.257,59.343 69.876,59.343 71.464,57.91 cw(c71.101,57.507) 71.514,57.857 72.4,56.818 72.4,56.3 70.145,54.045 69.565,54.045 P8.7@67.12,51.6
VL: C9.1 R1.2 R2.2 R3.2 R4.2 R11.1 U1.9 | length 75.8
  Top Layer w0.2: U1.9@136.223,65.3 136.488,65.3 v1(137.157,64.631)
  Top Layer w0.254: R3.2@129.896,71.5 R3.2@130.046,71.5 130.2,71.654 v1(130.2,72.2) ; R4.2@129.95,67.3 129.95,67.45 130.462,67.962 130.662,67.962 v1(130.7,68) ; R11.1@132.633,71.5 132.696,71.563 133.263,71.563 134.162,72.462 134.262,72.462 v1(134.3,72.5) ; v1(139.3,61.6) 139.3,62.75 R2.2@139.35,62.8
  Layer 2 w0.254: v1(130.2,72.2) 130.194,72.194 129.594,72.194 129.2,71.8 129.2,69.5 v1(130.7,68) 132.819,65.881 132.819,65.281 133.469,64.631 v1(137.157,64.631)
  Bottom Layer w0.254: R1.2@103.25,71.1 103.25,65.999 103.399,65.85 114.75,65.85 123.9,56.7 134.4,56.7 v1(139.3,61.6) 137.85,63.05 137.85,64.422 137.679,64.593 137.194,64.593 v1(137.157,64.631) ; v1(130.2,72.2) 133.947,72.2 134.247,72.5 v1(134.3,72.5)
VSys: C3.2 C5.1 C6.1 C11.1 C12.1 C15.1 C16.1 U1.23 U1.24 U3.1 U3.6 U4.3 U4.4 U5.3 U5.4 | length 45
  Top Layer w0.2: v1(131.162,66.557) 131.219,66.5 U1.24@132.075,66.5 ; v1@131.2,66.595 131.2,66.698 131.402,66.9 U1.23@131.777,66.9
  Top Layer w0.254: v1(131.162,66.557) v1@131.2,66.595 ; v1(131.442,58.658) C12.1@131.442,57.296 131.592,57.296 132.196,57.9 133.97,57.9 ; U4.4@133.821,57.286 133.821,57.751 133.97,57.9 ; U4.3@134.471,57.286 134.471,57.751 134.322,57.9 ; v1(135.746,54.879) 135.746,54.134 135.7,54.088 135.7,53.396 136.404,52.691 C16.1@136.554,52.691 136.704,52.691 137.296,52.1 139.1,52.1 ; C11.1@136.85,57.296 136.804,57.25 136.019,57.25 135.753,56.984 v1(135.7,56.984) 135.7,57.7 135.5,57.9 134.322,57.9 ; U5.3@138.934,52.701 138.934,52.266 139.1,52.1 ; U5.4@139.584,52.701 139.584,52.284 139.4,52.1 ; C15.1@141.963,52.691 141.813,52.691 141.221,52.1 139.4,52.1 ; 133.97,57.9 134.322,57.9 ; 139.1,52.1 139.4,52.1
  Bottom Layer w0.254: U3.1@122.87,68.45 122.9,68.42 122.9,68.1 123.5,67.5 124.9,67.5 ; C6.1@123.45,66.171 C5.1@124.904,66.171 124.904,67.496 124.9,67.5 ; C3.2@129.9,65.75 C3.2@129.95,65.7 ; v1(131.442,58.658) 130.627,59.473 130.627,66.477 130.67,66.52 131.125,66.52 v1(131.162,66.557) 127.743,66.557 126.863,67.437 126.863,67.497 125.91,68.45 U3.6@125.66,68.45 125.41,68.45 125.337,68.377 125.337,67.937 124.9,67.5 ; v1(135.7,56.984) 135.7,56.931 135.746,56.885 v1(135.746,54.879)
Vusb: C1.2 J1.1 U1.3 U1.4 U2.5 | length 32.7
  Top Layer w0.2: 133.6,63.5 133.883,63.5 134,63.617 U1.4@134,64.175 ; 133.6,63.6 U1.3@133.6,64.175
  Top Layer w0.254: v1(121.979,64.536) 122.7,65.257 122.7,69.678 122.551,69.827 122.473,69.827 122.025,70.275 C1.2@122.025,70.549 ; J1.1@124,54.15 124,55.675 123.8,55.875 123.8,60.3 125,61.5 125.032,61.468 125.176,61.468 125.208,61.5 125.7,61.5 126.591,60.609 129.856,60.609 132.296,63.049 133.149,63.049 133.414,63.314 133.6,63.5 ; v1@124.965,61.465 v1(125,61.431)
  Bottom Layer w0.254: v1(121.979,64.536) 123.099,63.416 123.099,62.551 124.205,61.445 124.945,61.445 125,61.5 U2.5@125,60.025
pads on no net: FLT1.6 P5.5 S1. S2. U3.3 U3.5 U6.11 U6.12 U6.17 U6.19 U6.26 U6.27 U6.28 U6.43 U6.44 U6.45 U6.46 U6.47 U8.1 U8.5 U8.6 U8.7 U8.8 U8.14
copper on no net: | length 68.2
  Top Layer w0.127: 81.8,50.45 81.8,50.7 81.8,51.35 ; 148.6,73.65 148.6,73.9 148.6,74.55 ; 81.3,50.4 81.3,51.4 ; 81.3,50.4 80.974,50.4 80.9,50.474 80.9,51.326 80.974,51.4 81.3,51.4 ; 81.3,50.4 81.8,50.4 82.3,50.4 ; 81.3,51.4 81.8,51.4 82.3,51.4 ; 82.3,50.4 82.3,51.4 ; 82.3,50.4 82.726,50.4 82.8,50.474 82.8,51.326 82.726,51.4 82.3,51.4 ; 148.1,73.6 148.6,73.6 149.1,73.6 ; 148.1,73.6 147.774,73.6 147.7,73.674 147.7,74.526 147.774,74.6 148.1,74.6 ; 148.1,73.6 148.1,74.6 ; 148.1,74.6 148.6,74.6 149.1,74.6 ; 149.1,73.6 149.526,73.6 149.6,73.674 149.6,74.526 149.526,74.6 149.1,74.6 ; 149.1,73.6 149.1,74.6
  Layer 2 w0.127: 81.8,50.45 81.8,50.7 81.8,51.35 ; 148.6,73.65 148.6,73.9 148.6,74.55 ; 81.3,50.4 81.3,51.4 ; 81.3,50.4 80.974,50.4 80.9,50.474 80.9,51.326 80.974,51.4 81.3,51.4 ; 81.3,50.4 81.8,50.4 82.3,50.4 ; 81.3,51.4 81.8,51.4 82.3,51.4 ; 82.3,50.4 82.3,51.4 ; 82.3,50.4 82.726,50.4 82.8,50.474 82.8,51.326 82.726,51.4 82.3,51.4 ; 148.1,73.6 148.6,73.6 149.1,73.6 ; 148.1,73.6 147.774,73.6 147.7,73.674 147.7,74.526 147.774,74.6 148.1,74.6 ; 148.1,73.6 148.1,74.6 ; 148.1,74.6 148.6,74.6 149.1,74.6 ; 149.1,73.6 149.526,73.6 149.6,73.674 149.6,74.526 149.526,74.6 149.1,74.6 ; 149.1,73.6 149.1,74.6
  Layer 3 w0.127: 81.8,50.45 81.8,50.7 81.8,51.35 ; 148.6,73.65 148.6,73.9 148.6,74.55 ; 81.3,50.4 81.3,51.4 ; 81.3,50.4 80.974,50.4 80.9,50.474 80.9,51.326 80.974,51.4 81.3,51.4 ; 81.3,50.4 81.8,50.4 82.3,50.4 ; 81.3,51.4 81.8,51.4 82.3,51.4 ; 82.3,50.4 82.3,51.4 ; 82.3,50.4 82.726,50.4 82.8,50.474 82.8,51.326 82.726,51.4 82.3,51.4 ; 148.1,73.6 148.6,73.6 149.1,73.6 ; 148.1,73.6 147.774,73.6 147.7,73.674 147.7,74.526 147.774,74.6 148.1,74.6 ; 148.1,73.6 148.1,74.6 ; 148.1,74.6 148.6,74.6 149.1,74.6 ; 149.1,73.6 149.526,73.6 149.6,73.674 149.6,74.526 149.526,74.6 149.1,74.6 ; 149.1,73.6 149.1,74.6
  Bottom Layer w0.127: 81.8,50.45 81.8,50.7 81.8,51.35 ; 148.6,73.65 148.6,73.9 148.6,74.55 ; 81.3,50.4 81.8,50.4 82.3,50.4 ; 81.3,50.4 80.974,50.4 80.9,50.474 80.9,51.326 80.974,51.4 81.3,51.4 ; 81.3,50.4 81.3,51.4 ; 81.3,51.4 81.8,51.4 82.3,51.4 ; 82.3,50.4 82.726,50.4 82.8,50.474 82.8,51.326 82.726,51.4 82.3,51.4 ; 82.3,50.4 82.3,51.4 ; 148.1,73.6 148.1,74.6 ; 148.1,73.6 147.774,73.6 147.7,73.674 147.7,74.526 147.774,74.6 148.1,74.6 ; 148.1,73.6 148.6,73.6 149.1,73.6 ; 148.1,74.6 148.6,74.6 149.1,74.6 ; 149.1,73.6 149.1,74.6 ; 149.1,73.6 149.526,73.6 149.6,73.674 149.6,74.526 149.526,74.6 149.1,74.6

## Polygon pours and split planes (outlines as drawn)
GND on Bottom Layer "GND_L04_P005" (solid, remove dead copper, pour order 5): 100.3,74.7 149.7,74.7 149.7,50.3 100.3,50.3
GND on Bottom Layer "GND_L04_P002" (solid, remove dead copper, pour order 2): 50.3,74.7 99.7,74.7 99.7,50.3 50.3,50.3
GND on Top Layer "GND_L01_P004" (solid, remove dead copper, pour order 4): 100.3,74.7 149.7,74.7 149.7,50.3 100.3,50.3
GND on Top Layer "GND_L01_P003" (solid, pour order 3): 50.3,74.7 99.7,74.7 99.7,50.3 50.3,50.3

## Keep-outs
Top Layer:
  rectangle: 80.8,50.3 82.9,51.5
  rectangle: 147.6,73.5 149.7,74.7
  rectangle: 90.8,62.5 100,74.7
Bottom Layer:
  rectangle: 80.8,50.3 82.9,51.5
  rectangle: 147.6,73.5 149.7,74.7
  rectangle: 90.8,62.5 100,74.7

## Other copper
Top Layer:
  text "1" at 147.8,73.9 h0.64
  text "1" at 81,50.7 h0.64
Layer 2:
  text "2" at 148.199,73.9 h0.64
  text "2" at 81.399,50.7 h0.64
Layer 3:
  text "3" at 149,73.907 h0.64
  text "3" at 82.2,50.707 h0.64
Bottom Layer:
  text "4" at 149.5,73.9 h0.64
  text "4" at 82.7,50.7 h0.64

## Silkscreen, mask and mechanical layers (free items; w line width, h text height)
Top Overlay:
  text "+5V N.C." at 51.114,71.6 h1.27 r270
  text "GND" at 53.714,71.6 h1.27 r270
  text "TX" at 56.3,71.6 h1.27 r270
  text "RX" at 58.8,71.6 h1.27 r270
  text "+3V3" at 61.414,71.6 h1.27 r270
  text "RESET" at 81.4,56.614 h1.27
  text "BOOT" at 81.4,52.814 h1.27
Bottom Overlay:
  text "DC OK" at 113.6,73.114 h1.27
  text "FAULT" at 113.5,70.814 h1.27
  text "CHARGING" at 116.1,68.414 h1.27
Board Shape:
  lines w0.4: 100,50 100,75 ; 50,50 50,75 150,75 150,50 50,50
V Cut:
  lines w0.4: 100,50 100,75

## Text inside footprints (layer, text, board x,y; h text height)
J1: Mechanical 6 "PCB EDGE" at 118.1,49.9 h0.3
J2: Bottom Overlay "1" at 106.41,57.2 h1.02 r270; Bottom Overlay "8" at 106.41,62.1 h1.02 r270